# EAGLE board BREAKER BOARD FOR TLC5951 (EAGLE 7.7.0)
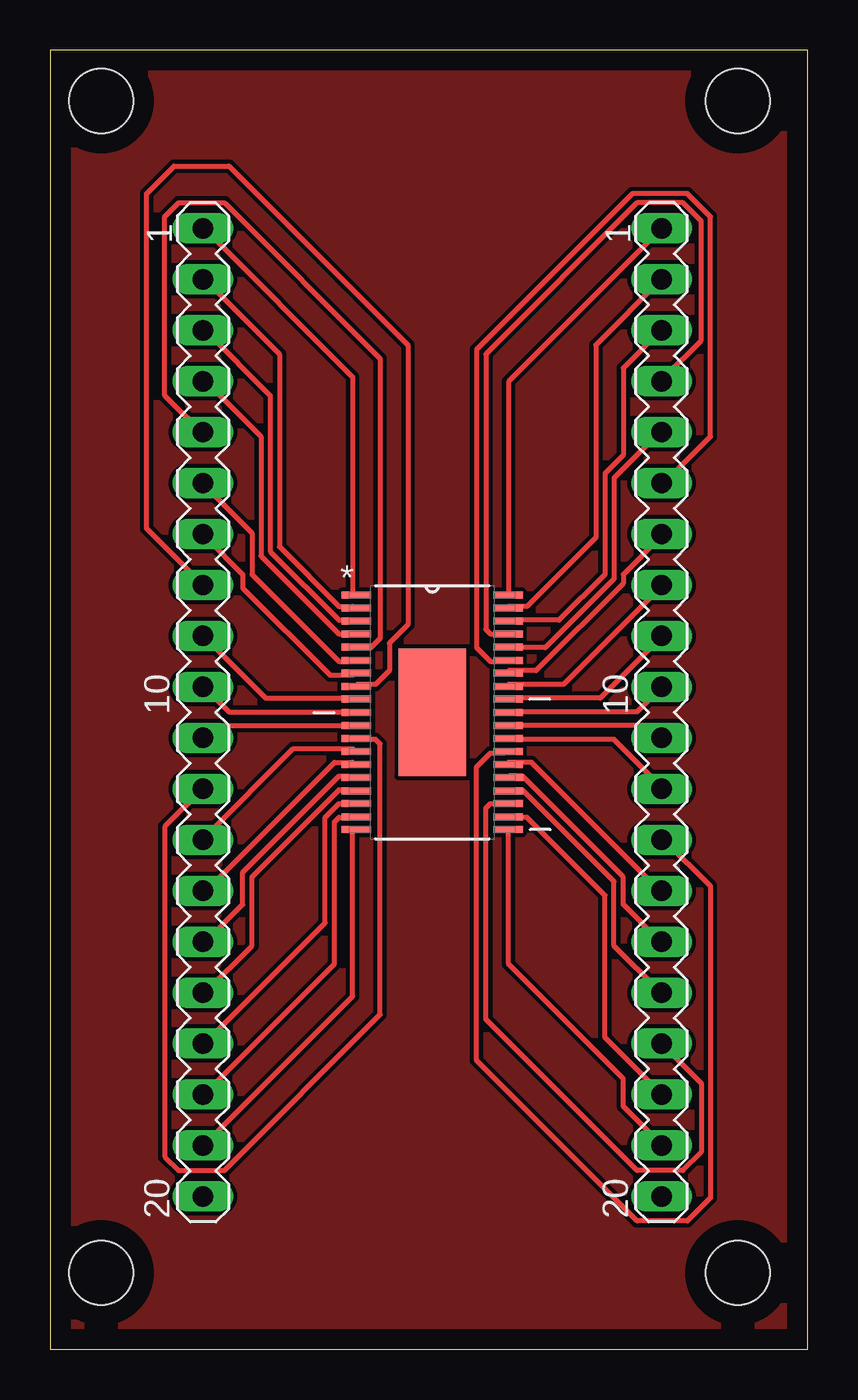
[diagram p0: board, top side]

Size 37.77 x 64.76 mm. Coordinates in mm from the lower left corner, seen from the top.
Outline: 0,0 37.77,0 37.77,64.76 0,64.76 0,0
Copper layers (1*16): Top 0.035mm / dielectric 1.5mm / Bottom 0.035mm
Design rules "default": minimum track width 10mil, minimum drill 24mil, track to track 8mil, track to pad 8mil, pad to pad 8mil, via to via 8mil, smd to smd 8mil, copper to edge 40mil, drill to drill 8mil, minimum pad ring 10mil, minimum via ring 8mil, stop-mask expansion 4mil, vias tented up to drill 0mil, thermal gap 10mil
Holes 3.2 mm at 2.54,62.23 34.29,62.23 34.29,3.81 2.54,3.81

## Footprints (pad centres in the part's own frame; a part is rotated, then mirrored left to right if it is on the bottom)
MA20-1 = drill 1.016 long: 1 -24.13,0; 2 -21.59,0; 3 -19.05,0; 4 -16.51,0; 5 -13.97,0; 6 -11.43,0; 7 -8.89,0; 8 -6.35,0; 9 -3.81,0; 10 -1.27,0; 11 1.27,0; 12 3.81,0; 13 6.35,0; 14 8.89,0; 15 11.43,0; 16 13.97,0; 17 16.51,0; 18 19.05,0; 19 21.59,0; 20 24.13,0
SOP65P810X120-39N = smd 1.473 x 0.356: 1 -3.785,5.842; 2 -3.785,5.207; 3 -3.785,4.547; 4 -3.785,3.912; 5 -3.785,3.251; 6 -3.785,2.591; 7 -3.785,1.956; 8 -3.785,1.295; 9 -3.785,0.66; 10 -3.785,0; 11 -3.785,-0.66; 12 -3.785,-1.295; 13 -3.785,-1.956; 14 -3.785,-2.591; 15 -3.785,-3.251; 16 -3.785,-3.912; 17 -3.785,-4.547; 18 -3.785,-5.207; 19 -3.785,-5.842; 20 3.785,-5.842; 21 3.785,-5.207; 22 3.785,-4.547; 23 3.785,-3.912; 24 3.785,-3.251; 25 3.785,-2.591; 26 3.785,-1.956; 27 3.785,-1.295; 28 3.785,-0.66; 29 3.785,0; 30 3.785,0.66; 31 3.785,1.295; 32 3.785,1.956; 33 3.785,2.591; 34 3.785,3.251; 35 3.785,3.912; 36 3.785,4.547; 37 3.785,5.207; 38 3.785,5.842 | smd 3.378 x 6.35: 39 0,0

## Placement (x,y rotation side)
SV0-20  [MA20-1]  7.62,31.75 270 top  (not fitted)
SV21-40  [MA20-1]  30.48,31.75 270 top  (not fitted)
TLC5951  [SOP65P810X120-39N]  19.05,31.75 0 top  (not fitted)

## Library data of the parts
SV0-20 SV21-40 = con-lstb; OC_FARNELL: unknown; OC_NEWARK: unknown
TLC5951 = Texas Instruments_By_element14_Batch_1; MPN: TLC5951DAP; OC_FARNELL: -; OC_NEWARK: 09R6488; PACKAGE: HTSSOP-38; SUPPLIER: Texas Instruments

## Nets
GND: SV0-20.20
PIN1: SV0-20.1 TLC5951.1
PIN2: SV0-20.2 TLC5951.2
PIN3: SV0-20.3 TLC5951.3
PIN4: SV0-20.4 TLC5951.4
PIN5: SV0-20.5 TLC5951.5
PIN6: SV0-20.6 TLC5951.6
PIN7: SV0-20.7 TLC5951.7
PIN8: SV0-20.8 TLC5951.8
PIN9: SV0-20.9 TLC5951.9
PIN10: SV0-20.10 TLC5951.10
PIN11: SV0-20.11 TLC5951.11
PIN12: SV0-20.12 TLC5951.12
PIN13: SV0-20.13 TLC5951.13
PIN14: SV0-20.14 TLC5951.14
PIN15: SV0-20.15 TLC5951.15
PIN16: SV0-20.16 TLC5951.16
PIN17: SV0-20.17 TLC5951.17
PIN18: SV0-20.18 TLC5951.18
PIN19: SV0-20.19 TLC5951.19
PIN20: SV21-40.19 TLC5951.20
PIN21: SV21-40.18 TLC5951.21
PIN22: SV21-40.17 TLC5951.22
PIN23: SV21-40.16 TLC5951.23
PIN24: SV21-40.15 TLC5951.24
PIN25: SV21-40.14 TLC5951.25
PIN26: SV21-40.13 TLC5951.26
PIN27: SV21-40.12 TLC5951.27
PIN28: SV21-40.11 TLC5951.28
PIN29: SV21-40.10 TLC5951.29
PIN30: SV21-40.9 TLC5951.30
PIN31: SV21-40.8 TLC5951.31
PIN32: SV21-40.7 TLC5951.32
PIN33: SV21-40.6 TLC5951.33
PIN34: SV21-40.5 TLC5951.34
PIN35: SV21-40.4 TLC5951.35
PIN36: SV21-40.3 TLC5951.36
PIN37: SV21-40.2 TLC5951.37
PIN38: SV21-40.1 TLC5951.38
PIN39: TLC5951.39
PIN40: SV21-40.20

## Tracks (layer width: path | path; a pad name or v marks a point on that pad's centre or on a via)
N$1
  pour Top: 0,64.77 0,0 38.1,0 38.1,64.77
PIN1
  Top 0.254: TLC5951.1 15.09,37.72 15.09,48.46 7.77,55.78 SV0-20.1
PIN2
  Top 0.254: TLC5951.2 15.09,37.03 14.4,37.03 11.43,40.01 11.43,49.61 7.77,53.26 SV0-20.2
PIN3
  Top 0.254: TLC5951.3 15.09,36.35 14.4,36.35 10.97,39.78 10.97,47.55 7.77,50.75 SV0-20.3
PIN4
  Top 0.254: TLC5951.4 14.4,35.66 10.52,39.55 10.52,45.49 7.77,48.23 SV0-20.4
PIN5
  Top 0.254: TLC5951.5 15.32,34.98 16,34.98 16.46,35.43 16.46,49.38 8.69,57.15 6.4,57.15 5.71,56.46 5.71,47.55 7.54,45.72 SV0-20.5
PIN6
  Top 0.254: TLC5951.6 15.09,34.29 14.4,34.29 10.06,38.63 10.06,40.69 7.77,42.98 SV0-20.6
PIN7
  Top 0.254: TLC5951.7 15.09,33.6 13.95,33.6 9.6,37.95 9.6,38.63 7.77,40.46 SV0-20.7
PIN8
  Top 0.254: SV0-20.8 4.8,40.92 4.8,57.61 6.17,58.98 8.91,58.98 17.83,50.06 17.83,36.12 16.92,35.2 16.92,33.83 16.23,33.15 15.32,33.15 TLC5951.8
PIN9
  Top 0.254: TLC5951.9 15.09,32.46 10.74,32.46 7.77,35.43 SV0-20.9
PIN10
  Top 0.254: TLC5951.10 15.09,31.77 8.91,31.77 7.77,32.92 SV0-20.10
PIN11
  Top 0.254: TLC5951.11 8.23,31.09 SV0-20.11
PIN12
  Top 0.254: TLC5951.12 15.32,30.4 16.23,30.4 16.46,30.18 16.46,16.69 8.69,8.91 6.4,8.91 5.71,9.6 5.71,26.06 7.54,27.89 SV0-20.12
PIN13
  Top 0.254: TLC5951.13 15.09,29.95 12.12,29.95 7.77,25.6 SV0-20.13
PIN14
  Top 0.254: TLC5951.14 15.09,29.26 14.17,29.26 7.77,22.86 SV0-20.14
PIN15
  Top 0.254: TLC5951.15 15.09,28.57 14.4,28.57 9.6,23.77 9.6,22.17 7.77,20.34 SV0-20.15
PIN16
  Top 0.254: TLC5951.16 15.09,27.89 14.4,27.89 10.06,23.55 10.06,20.12 7.77,17.83 SV0-20.16
PIN17
  Top 0.254: TLC5951.17 14.4,27.2 13.72,26.52 13.72,21.26 7.77,15.32 SV0-20.17
PIN18
  Top 0.254: TLC5951.18 15.09,26.52 14.4,26.52 14.17,26.29 14.17,19.2 7.77,12.8 SV0-20.18
PIN19
  Top 0.254: TLC5951.19 15.09,25.83 15.09,17.6 7.77,10.29 SV0-20.19
PIN20
  Top 0.254: TLC5951.20 22.86,25.83 22.86,19.2 28.57,13.49 28.57,12.12 30.4,10.29 SV21-40.19
PIN21
  Top 0.254: TLC5951.21 22.86,26.52 23.77,26.52 27.66,22.63 27.66,15.54 30.4,12.8 SV21-40.18
PIN22
  Top 0.254: TLC5951.22 21.95,27.2 21.72,26.98 21.72,16.46 29.26,8.91 31.55,8.91 32.46,9.83 32.46,13.26 SV21-40.17
PIN23
  Top 0.254: TLC5951.23 22.86,27.89 23.55,27.89 28.12,23.32 28.12,20.12 30.4,17.83 SV21-40.16
PIN24
  Top 0.254: TLC5951.24 22.86,28.57 23.55,28.57 28.57,23.55 28.57,22.17 30.4,20.34 SV21-40.15
PIN25
  Top 0.254: TLC5951.25 22.86,29.26 24,29.26 30.4,22.86 SV21-40.14
PIN26
  Top 0.254: TLC5951.26 22.63,29.72 21.95,29.72 21.26,29.03 21.26,14.4 29.26,6.4 31.77,6.4 32.92,7.54 32.92,23.09 30.63,25.38 SV21-40.13
PIN27
  Top 0.254: TLC5951.27 22.86,30.4 28.12,30.4 30.4,28.12 SV21-40.12
PIN28
  Top 0.254: TLC5951.28 29.95,31.09 30.4,30.63 SV21-40.11
PIN29
  Top 0.254: TLC5951.29 22.86,31.77 29.26,31.77 30.4,32.92 SV21-40.10
PIN30
  Top 0.254: TLC5951.30 22.86,32.46 27.43,32.46 30.4,35.43 SV21-40.9
PIN31
  Top 0.254: TLC5951.31 22.86,33.15 25.6,33.15 30.4,37.95 SV21-40.8
PIN32
  Top 0.254: TLC5951.32 22.86,33.83 24.23,33.83 28.57,38.18 28.57,38.63 30.4,40.46 SV21-40.7
PIN33
  Top 0.254: TLC5951.33 22.63,34.29 21.95,34.29 21.26,34.98 21.26,49.84 29.03,57.61 31.77,57.61 32.92,56.46 32.92,45.49 30.63,43.2 SV21-40.6
PIN34
  Top 0.254: TLC5951.34 22.86,34.98 24.69,34.98 28.12,38.41 28.12,43.43 30.4,45.72 SV21-40.5
PIN35
  Top 0.254: TLC5951.35 21.95,35.66 21.72,35.89 21.72,49.61 29.26,57.15 31.55,57.15 32.46,56.24 32.46,50.29 30.63,48.46 SV21-40.4
PIN36
  Top 0.254: TLC5951.36 22.86,36.35 25.38,36.35 27.66,38.63 27.66,43.66 28.57,44.58 28.57,48.92 30.4,50.75 SV21-40.3
PIN37
  Top 0.254: SV21-40.2 27.2,50.06 27.2,40.46 23.77,37.03 22.86,37.03 TLC5951.37
PIN38
  Top 0.254: TLC5951.38 22.86,37.72 22.86,48.23 30.4,55.78 SV21-40.1